# Altium PCB PowerV2.PcbDoc
Units mil, origin at the board's own origin, x right, y up, seen from the top; angles counter-clockwise.
Board outline 3625 x 3400 mil, 2 copper layers (Component Side, Bottom Layer), stack 65.756 mil thick; 65 components, 40 nets, 294 pads, 73 vias.
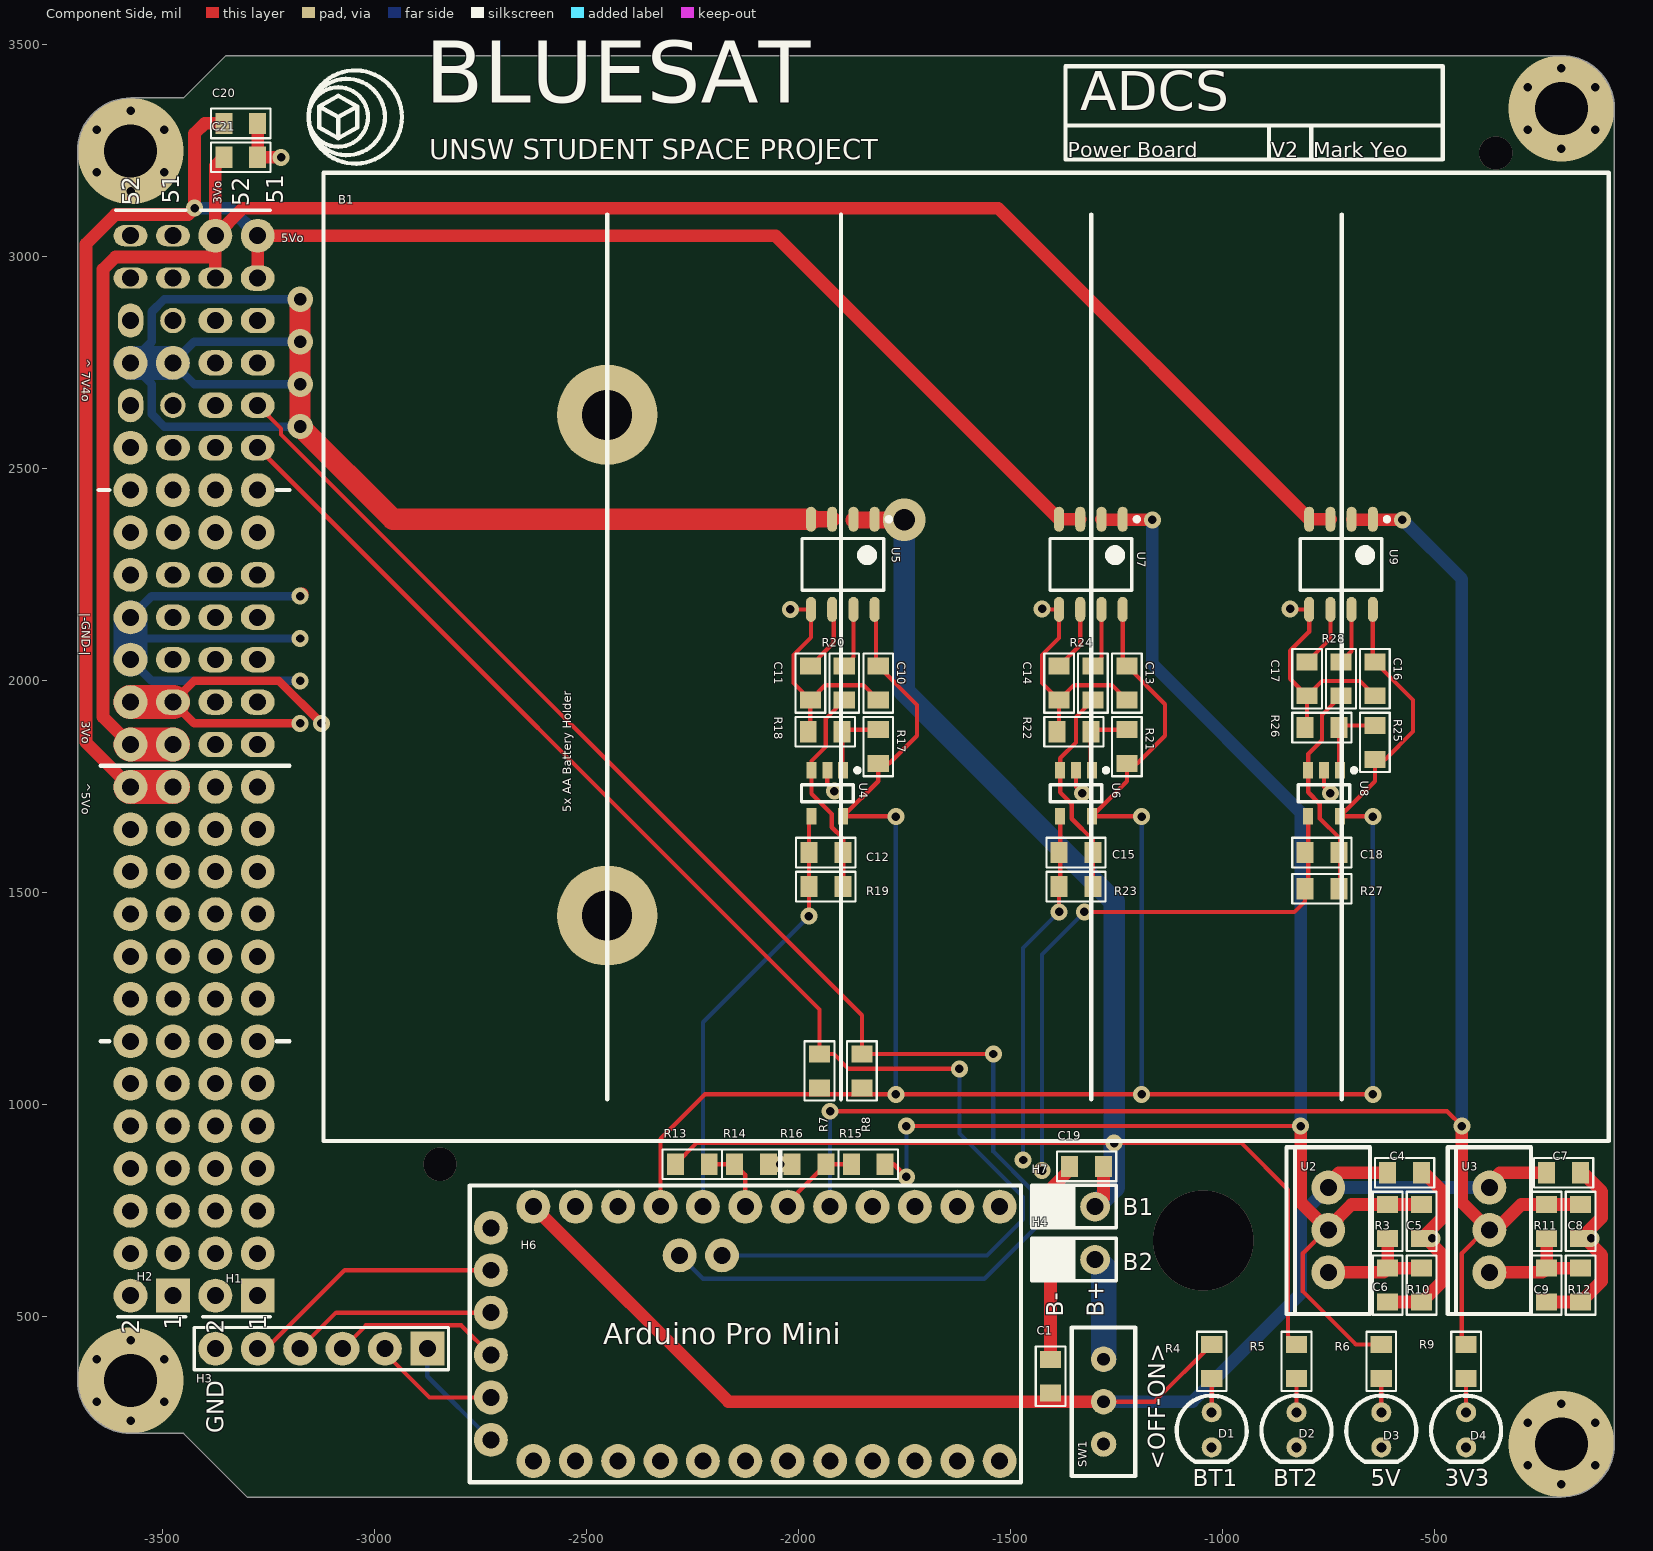
[diagram p0: Component Side view]
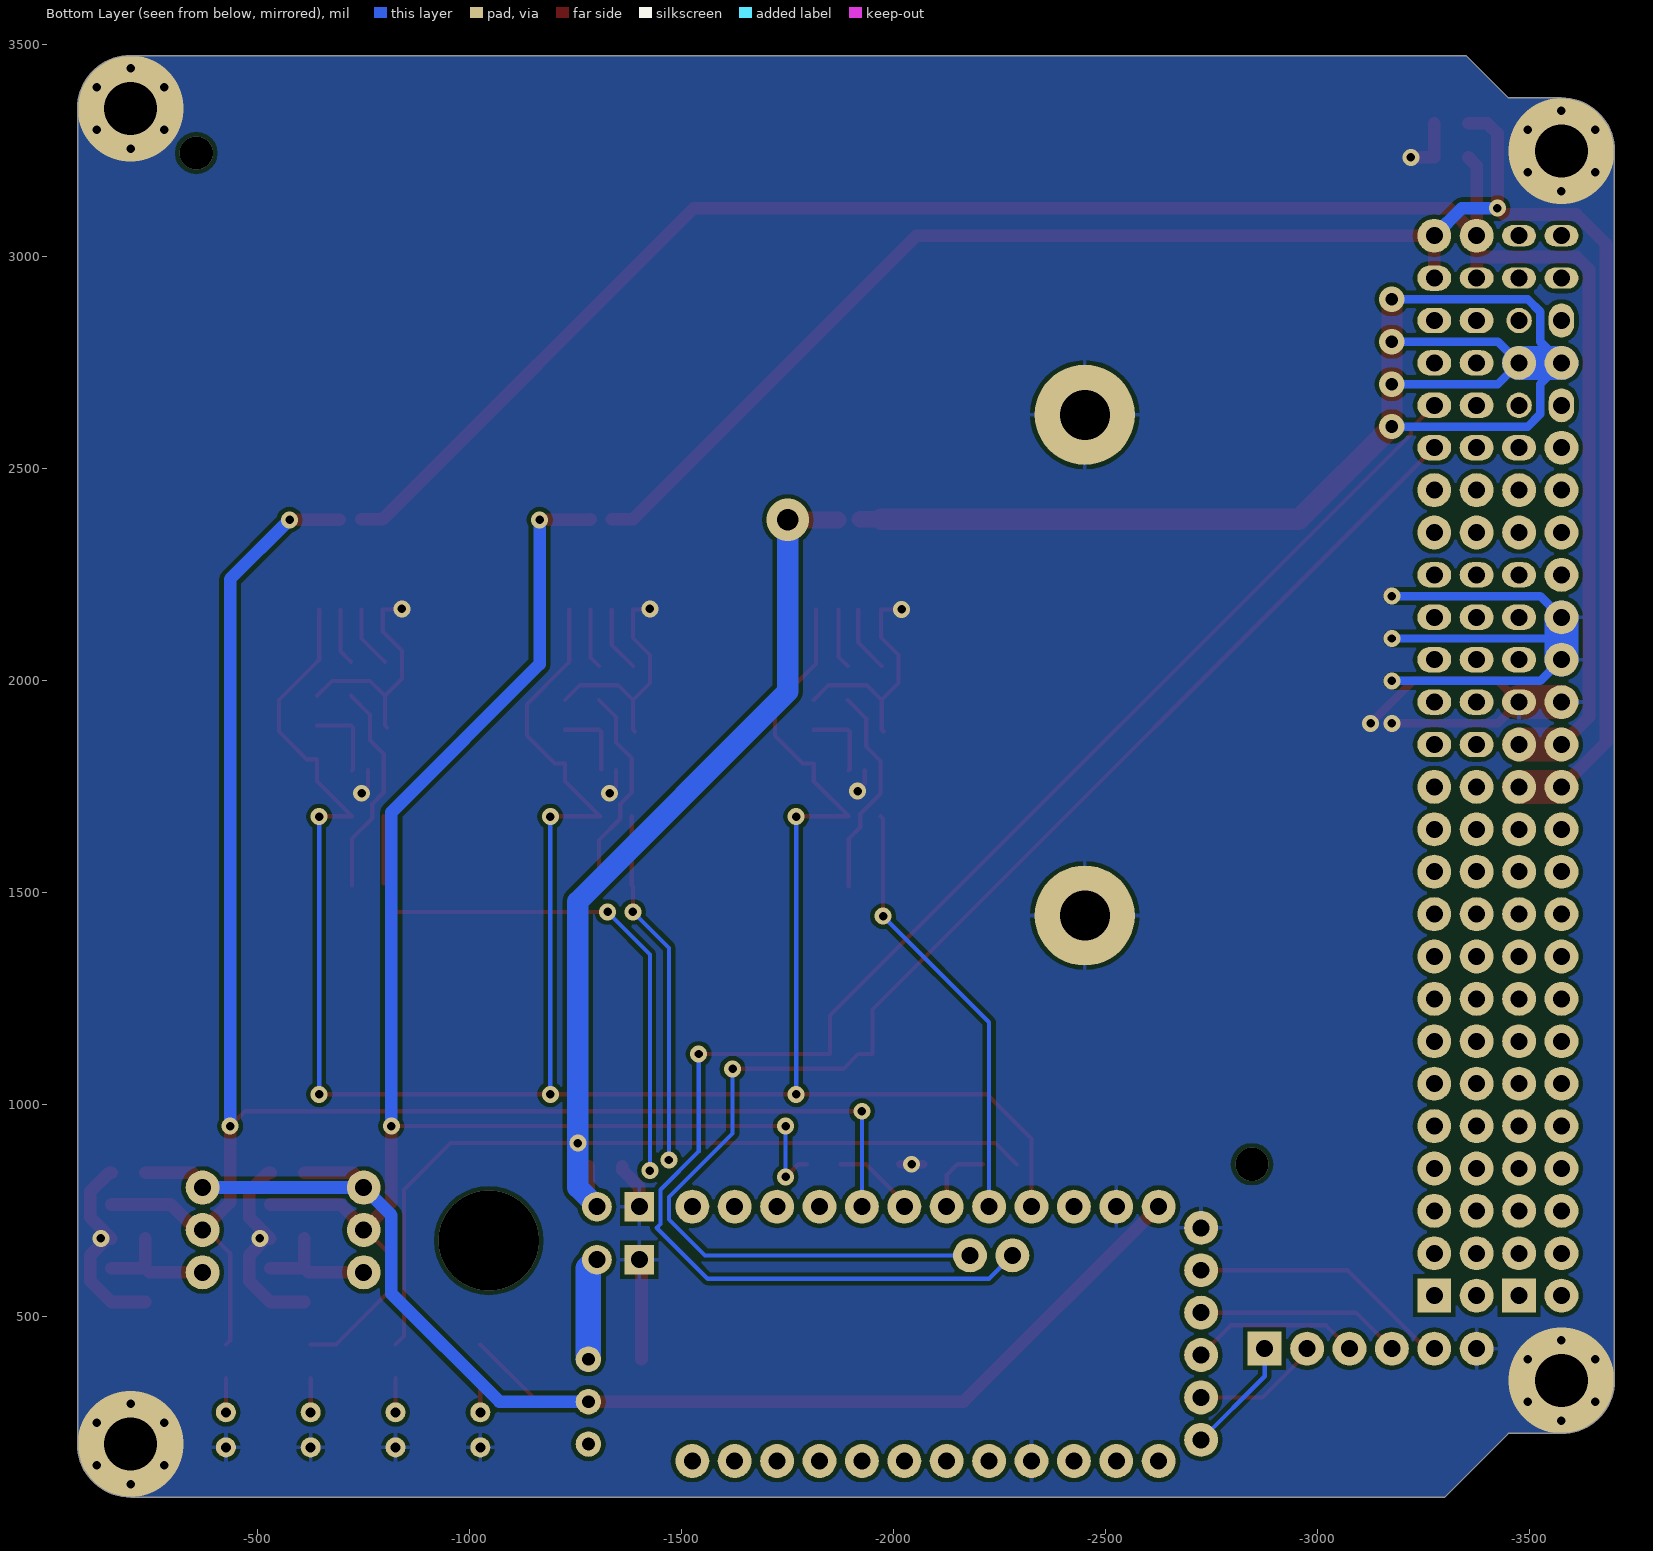
[diagram p1: Bottom Layer view, seen from below]

## Layer stack, top to bottom
Top Solder: solder mask 0.394, Solder Resist, Dk 3.5
Component Side: signal copper 1.378
Dielectric 1: core 63, FR-4, Dk 4.2
Bottom Layer: signal copper 1.378
Solder Side: solder mask 0.394, Solder Resist, Dk 3.5

## Board outline
-3575,225 cw(c-3575,350) -3700,350 -3700,3250 cw(c-3575,3250) -3575,3375 -3450,3375 -3350,3475 -200,3475 cw(c-200,3350) -75,3350 -75,200 cw(c-200,200) -200,75 -3300,75 -3450,225

## Design rules (kind name [scope] priority, off if disabled: settings)
Clearance [All] p1: gap=10
Clearance "Clearance (Same Net)" [All] p2: gap=0 except(8: SMDPad-SMDPad SMDPad-THPad SMDPad-Via)
ComponentClearance [All] p1: gap=0 collisioncheckmode=3 verticalgap=0 showdistances=FALSE
HoleSize HoleSize_1 [All] p1: absolutevalues=TRUE maxlimit=100000 minlimit=24 maxpercent=80.000 minpercent=20.000
HoleSize [All] p2: absolutevalues=TRUE maxlimit=100 minlimit=1 maxpercent=80.000 minpercent=20.000
HoleToHoleClearance mdViaViaSameLayer [All] p1: gap=8 allowstackedmicrovias=TRUE
HoleToHoleClearance [All] p2: gap=10 allowstackedmicrovias=TRUE
PasteMaskExpansion mlMinCreamFrame [All] p1: expansion=0
PasteMaskExpansion [All] p2: expansion=0
PlaneConnect PlaneConnect_1 [All] p1: planeconnectstyle=Relief reliefexpansion=20 reliefentries=4 reliefconductorwidth=10 reliefairgap=10
PlaneConnect PlaneConnect_2 [IsVia AND InNet('GND')] p2: planeconnectstyle=Direct reliefexpansion=20 reliefentries=4 reliefconductorwidth=10 reliefairgap=10
PolygonConnect ThermalVias [IsVia] p1: connectstyle=Direct reliefconductorwidth=10 reliefentries=4 polygonreliefangle="90 Angle" airgapwidth=10
PolygonConnect [All] p2: connectstyle=Relief reliefconductorwidth=10 reliefentries=4 polygonreliefangle="90 Angle" airgapwidth=10
RoutingVias [All] p1: holewidth=20 width=40 viastyle="Through Hole" minholewidth=20 minwidth=40 maxholewidth=20 maxwidth=40
SilkToSilkClearance [All] p1 off: silktosilkclearance=10
SilkToSolderMaskClearance [IsPad] p1 off: minsilkscreentomaskgap=10 clearancetoexposedcopper=TRUE
SolderMaskExpansion mlMinStopFrame [All] p1: expansion=4
SolderMaskExpansion [All] p2: expansion=4
Width Width_1 [All] p1: maxlimit=100000 minlimit=6 preferedwidth=10
Width [All] p2: maxlimit=10 minlimit=8 preferedwidth=10
23 further rules are at their usual default settings.

## Components (designator, comment, footprint, x,y, rotation, side; value= is the part's Value field where it differs from the comment)
B1 "5x AA Battery Holder" "5x AA Battery Holder" -3120,915 r0 top
C1 "10uF" 0805C-GENERIC -1405,330 r90 top
C4 "100nF" 0805C-TBD -600,840 r0 top
C5 "1UF" 0805C-GENERIC -530,755 r270 top
C6 "10uF" 0805C-GENERIC -610,605 r270 top
C7 "100nF" 0805C-TBD -225,840 r0 top
C8 "1UF" 0805C-GENERIC -155,755 r270 top
C9 "10uF" 0805C-GENERIC -235,605 r270 top
C10 "100nF" 0805C-TBD -1811.57,2025 r270 top
C11 "10nF" 0805C-TBD -1971.57,2025 r270 top
C12 "1nF" 0805C-TBD -1965,1595 r0 top
C13 "100nF" 0805C-TBD -1225,2025 r270 top
C14 "10nF" 0805C-TBD -1385,2025 r270 top
C15 "1nF" 0805C-TBD -1375,1595 r0 top
C16 "100nF" 0805C-TBD -640,2035 r270 top
C17 "10nF" 0805C-TBD -800,2035 r270 top
C18 "1nF" 0805C-TBD -795,1595 r0 top
C19 "10uF" 0805C-GENERIC -1290,855 r180 top
C20 "10uF" 0805C-GENERIC -3345,3315 r0 top
C21 "10uF" 0805C-GENERIC -3345,3235 r0 top
D1 "LED" LED -1025,275 r0 top
D2 "LED" LED -825,275 r0 top
D3 "LED" LED -625,275 r0 top
D4 "LED" LED -425,275 r0 top
H1 "26X2 Header" "26X2 Header"#1 -3275,550 r90 top
H2 "26X2 Header" "26X2 Header"#2 -3475,550 r90 top
H3 "Header 6" HDR1X6 -2875,425 r180 top
H4 "HEADER-1X2" HEADER-1X2 -1400,635 r90 top
H6 "Arduino Pro Mini" "Arduino Pro Mini" -2625,160 r90 top
H7 "HEADER-1X2" HEADER-1X2 -1400,760 r90 top
R3 "243R" 0805R-GENERIC -610,695 r90 top
R4 "300R" 0805R-150 -1025,425 r270 top
R5 "300R" 0805R-150 -825,425 r270 top
R6 "150R" 0805R-150 -625,425 r270 top
R7 "4K7" 0805R-4K7 -1950,1050 r90 top
R8 "4K7" 0805R-4K7 -1850,1050 r90 top
R9 "150R" 0805R-150 -425,425 r270 top
R10 "715R" 0805R-GENERIC -530,605 r270 top
R11 "243R" 0805R-GENERIC -235,695 r90 top
R12 "392R" 0805R-GENERIC -155,605 r270 top
R13 "28K5" 0805R-10K -2290,860 r0 top
R14 "10K" 0805R-10K -2150,860 r0 top
R15 "10K" 0805R-10K -1795,860 r180 top
R16 "40K" 0805R-10K -1935,860 r180 top
R17 "100K" 0805R-100K -1811.57,1815 r90 top
R18 "100K" 0805R-100K -1906.57,1880 r180 top
R19 "10K" 0805R-3K3 -1965,1515 r0 top
R20 "1K" 0805R-1K -1891.57,2025 r270 top
R21 "100K" 0805R-100K -1225,1815 r90 top
R22 "100K" 0805R-100K -1320,1880 r180 top
R23 "10K" 0805R-3K3 -1375,1515 r0 top
R24 "1K" 0805R-1K -1305,2025 r270 top
R25 "100K" 0805R-100K -640,1825 r90 top
R26 "100K" 0805R-100K -735,1890 r180 top
R27 "10K" 0805R-3K3 -795,1510 r0 top
R28 "1K" 0805R-1K -720,2035 r270 top
SW1 "ToggleSwitch" SWITCHFOOTPRINT -1280,400 r180 top
U2 "LM317T" LM317T -750,605 r90 top
U3 "LM317T" LM317T -370,605 r90 top
U4 "LM321" LM321 -1931.57,1735 r270 top
U5 "ACS712" ACS712 -1895,2275 r270 top
U6 "LM321" LM321 -1345,1735 r270 top
U7 "ACS712" ACS712 -1310,2275 r270 top
U8 "LM321" LM321 -760,1735 r270 top
U9 "ACS712" ACS712 -720,2275 r270 top

## Footprints (in the part's own frame and the unit in brackets; to place one, negate y for a bottom-side part, rotate by r counter-clockwise, add the part's x,y. Pads: shape width x height; smd on the part's side, far side on the other; paste and mask are expansions set on the pad)
"5x AA Battery Holder" [mm]
  round 6 hole 3 mask+0.102: 1(17,43.5)
  round 6 hole 3: 2(17,13.5)
  silkscreen extent 0,0 77,58
"26X2 Header"#1 [mil]
  rect 80x80 hole 40: 1(0,0)
  round 80 hole 40: 2(0,100) 3(100,0) 4(100,100) 5(200,0) 6(200,100) 7(300,0) 8(300,100) 9(400,0) 10(400,100) 11(500,0) 12(500,100) 13(600,0) 14(600,100) 15(700,0) 16(700,100) 17(800,0) 18(800,100) 19(900,0) 20(900,100) 21(1000,0) 22(1000,100) 23(1100,0) 24(1100,100) 25(1200,0) 26(1200,100) 37(1800,0) 38(1800,100) 39(1900,0) 40(1900,100) 51(2500,0) 52(2500,100)
  oval 60x80 hole 40: 27(1300,0) 28(1300,100) 29(1400,0) 30(1400,100) 31(1500,0) 32(1500,100) 33(1600,0) 34(1600,100) 35(1700,0) 36(1700,100) 41(2000,0) 42(2000,100) 43(2100,0) 44(2100,100) 45(2200,0) 46(2200,100) 47(2300,0) 48(2300,100) 49(2400,0)
  oval 50x80 hole 40: 50(2400,100)
  silkscreen extent -50,-30 2560,135, body extent -55,-47 2555,150, height 335
"26X2 Header"#2 [mil]
  rect 80x80 hole 40: 1(0,0)
  round 80 hole 40: 2(0,100) 3(100,0) 4(100,100) 5(200,0) 6(200,100) 7(300,0) 8(300,100) 9(400,0) 10(400,100) 11(500,0) 12(500,100) 13(600,0) 14(600,100) 15(700,0) 16(700,100) 17(800,0) 18(800,100) 19(900,0) 20(900,100) 21(1000,0) 22(1000,100) 23(1100,0) 24(1100,100) 25(1200,0) 26(1200,100) 27(1300,0) 28(1300,100) 30(1400,100) 32(1500,100) 34(1600,100) 36(1700,100) 37(1800,0) 38(1800,100) 39(1900,0) 40(1900,100) 42(2000,100) 45(2200,0) 46(2200,100)
  oval 60x80 hole 40: 29(1400,0) 31(1500,0) 33(1600,0) 35(1700,0) 41(2000,0)
  round 60 hole 40: 43(2100,0) 47(2300,0)
  oval 80x60 hole 40: 44(2100,100) 48(2300,100)
  oval 50x80 hole 40: 49(2400,0) 50(2400,100) 51(2500,0) 52(2500,100)
  silkscreen extent -50,-30 2560,135, body extent -55,-47 2555,150, height 335
0805C-GENERIC [mil] "CAPACITOR 0805"
  rect 40x50 smd: 1(-10,0) 2(70,0)
  silkscreen extent -40,-35 100,35, body extent -11,-25 70,25, height 26
0805C-TBD [mil] "CAPACITOR 0805"
  rect 40x50 smd: 1(-10,0) 2(70,0)
  silkscreen extent -40,-35 100,35, body extent -11,-25 70,25, height 26
0805R-1K [mil] "RESISTOR 0805"
  rect 40x50 smd: 1(-10,0) 2(70,0)
  silkscreen extent -40,-35 100,35, body extent -11,-25 70,25, height 27
0805R-3K3 [mil] "RESISTOR 0805"
  rect 40x50 smd: 1(-10,0) 2(70,0)
  silkscreen extent -40,-35 100,35, body extent -11,-25 70,25, height 27
0805R-4K7 [mil] "RESISTOR 0805"
  rect 40x50 smd: 1(-10,0) 2(70,0)
  silkscreen extent -40,-35 100,35, body extent -11,-25 70,25, height 27
0805R-10K [mil] "RESISTOR 0805"
  rect 40x50 smd: 1(0,0) 2(80,0)
  silkscreen extent -30,-35 110,35, body extent -1,-25 80,25, height 27
0805R-100K [mil] "RESISTOR 0805"
  rect 40x50 smd: 1(-10,0) 2(70,0)
  silkscreen extent -40,-35 100,35, body extent -11,-25 70,25, height 27
0805R-150 [mil] "RESISTOR 0805"
  rect 40x50 smd: 1(-10,0) 2(70,0)
  silkscreen extent -40,-35 100,35, body extent -11,-25 70,25, height 27
0805R-GENERIC [mil] "RESISTOR 0805"
  rect 40x50 smd: 1(-10,0) 2(70,0)
  silkscreen extent -40,-35 100,35, body extent -11,-25 70,25, height 27
ACS712 [mm]
  oval 1.5x0.6 smd: 1(-2.7,1.905) 2(-2.7,0.635) 3(-2.7,-0.635) 4(-2.7,-1.905) 5(2.7,-1.905) 6(2.7,-0.635) 7(2.7,0.635) 8(2.7,1.905)
  silkscreen extent -2.82,-2.45 1.55,2.88, body extent -3,-2.45 3,2.45, height 1.9
"Arduino Pro Mini" [mil]
  round 80 hole 40: 1(0,0) 2(0,-100) 3(0,-200) 4(0,-300) 5(0,-400) 6(0,-500) 7(0,-600) 8(0,-700) 9(0,-800) 10(0,-900) 11(0,-1000) 12(0,-1100) 13(600,0) 14(600,-100) 15(600,-200) 16(600,-300) 17(600,-400) 18(600,-500) 19(600,-600) 20(600,-700) 21(600,-800) 22(600,-900) 23(600,-1000) 24(600,-1100) 25(485,-345) 26(485,-445) 27(50,100) 28(150,100) 29(250,100) 30(350,100) 31(450,100) 32(550,100)
  silkscreen extent -50,-1150 650,150
HDR1X6 [mil] "Connector; Header; 6 Position"
  rect 80x80 hole 40: 1(0,0)
  round 80 hole 40: 2(100,0) 3(200,0) 4(300,0) 5(400,0) 6(500,0)
  silkscreen extent -50,-50 550,50
HEADER-1X2 [mil]
  rect 70x70 hole 40: 1(0,0)
  round 70 hole 40: 2(0,-100)
  silkscreen extent -50,-150 50,50, body extent -50,-150 50,50, height 470
LED [mm]
  round 1.2 hole 0.6: 1(0,0) 2(0,-2.1)
  silkscreen extent -2.1,-2.96 2.1,1
LM317T [mil]
  round 80 hole 40: 1(0,0) 2(100,0) 3(200,0)
  silkscreen extent -98,-98 295,98
LM321 [mm]
  rect 1x0.6 smd: 1(-1.375,0.95) 2(-1.375,0) 3(-1.375,-0.95) 4(1.375,-0.95) 5(1.375,0.95)
  silkscreen extent -1.5,-1.55 0.5,1.93, body extent -1.5,-1.53 1.5,1.53, height 1.45
SWITCHFOOTPRINT [mil]
  round 60 hole 30: 2(0,0) 3(0,100) 4(0,200)
  silkscreen extent -75,-75 75,275, body extent -75,-75 75,275, height 300

## Part data
C1 C19 C20 C21: library part 0805C-10UF-16V-X5R-TDK, "CAPACITOR 0805 CERAMIC"
C4 C7 C10 C11 C12 C13 C14 C15 C16 C17 C18: library part 0805C-100nF-25V-X7R-MUR, "CAPACITOR 0805 CERAMIC"
C5 C8: library part 0805C-2U2-6V3-X5R-PAN, "CAPACITOR 0805 CERAMIC"
C6 C9: library part 0805C-10UF-25V-X5R-SAM, "CAPACITOR 0805 CERAMIC"
D1 D2 D3 D4: "Small LED"
H3: "Header, 6-Pin"
R3 R10 R11 R12: library part 0805R-1R, "RESISTOR 0805 1/3 WATT"
R4 R5 R6 R9: library part 0805R-150, "RESISTOR 0805 1/4 WATT THIN FILM"
R7 R8: library part 0805R-4K7, "RESISTOR 0805 1/4 WATT THIN FILM"
R13 R14 R15 R16: library part 0805R-10K, "RESISTOR 0805 1/4 WATT THIN FILM"
R17 R18 R21 R22 R25 R26: library part 0805R-100K, "RESISTOR 0805 1/4 WATT THIN FILM"
R19 R23 R27: library part 0805R-3K3, "RESISTOR 0805 1/4 WATT THIN FILM"
R20 R24 R28: library part 0805R-1K, "RESISTOR 0805 1/4 WATT THIN FILM"
U2 U3: "Adjustable Voltage Regulator"
U4 U6 U8: "Op-amp"
U5 U7 U9: "Current Sensor"

## Via types
v1: diameter 40, hole 20, Component Side to Bottom Layer, 61 vias
v2: diameter 250, hole 125, Component Side to Bottom Layer, 4 vias
v3: diameter 60, hole 30, Component Side to Bottom Layer, 4 vias
v4: diameter 78.74, hole 78.74, Component Side to Bottom Layer, 2 vias
v5: diameter 236.22, hole 236.22, Component Side to Bottom Layer, 1 vias
v6: diameter 100, hole 50, Component Side to Bottom Layer, 1 vias

## Nets (pads, with @x,y where several pads share a name; then routed paths per layer and width w, separated by ;. In a path a pad name is that pad's centre, name@x,y a point inside that pad or via, vN(x,y) a via of type N, cw(c..) or ccw(c..) an arc to the next point about the centre after c; other vN are vias at no path point)
3V3: C8.1 H6.20 R9.1 R11.2 U3.2 U9.1 U9.2 | length 4154.9
  Component Side w10: v1(-1925,985) -470,985 v1(-435,950) ; R9.1 -435,445 -435,650 U3.2@-380,705
  Component Side w30: U9.2@-693.7,2380 v1(-575,2380) ; v1(-435,950) -435,770 U3.2 ; U3.2@-380,705 U3.2 ; C8.1 R11.2 -295,765 -355,705 U3.2
  Bottom Layer w10: H6.20 v1(-1925,985)
  Bottom Layer w30: v1(-575,2380) -435,2240 v1(-435,950)
3V3_OUT: C21.1 H1.50 H1.52 H2.27 H2.28 U9.3 U9.4 | length 4778.9
  Component Side w30: H2.28 -3640,1915 -3640,2970.71 -3610.71,3000 -3375,3000 ; H1.50 -3375,3000 ; C21.1 -3375,3215 H1.52 ; U9.3 U9.4 -1528.7,3115 -3310,3115 H1.52 ; -3375,3000 H1.52
  Component Side w80: H2.28 H2.27
5V: C5.1 R3.2 R6.1 R15.1 U2.2 U7.1 U7.2 | length 3734.3
  Component Side w10: R15.1 -1775,860 v1(-1745,830) ; v1(-1745,950) v1(-815,950) ; U2.2@-755,705 -810,650 -810,560 -685,435 R6.1
  Component Side w30: U7.2 -1283.7,2380 v1(-1165,2380) ; v1(-815,950) -815,770 U2.2@-752.5,707.5 ; U2.2@-755,705 U2.2@-752.5,707.5 ; U2.2 U2.2@-752.5,707.5 ; C5.1 R3.2 -695,765 U2.2@-752.5,707.5
  Bottom Layer w10: v1(-1745,830) v1(-1745,950)
  Bottom Layer w30: v1(-1165,2380) -1165,2040 -815,1690 v1(-815,950)
5V_OUT: C20.1 H1.49 H1.51 H2.25 H2.26 U7.3 U7.4 | length 4463
  Component Side w30: H2.26 -3680,1855 -3680,3030.71 -3610.71,3100 -3439,3100 v1(-3424,3115) -3424,3291 -3400,3315 C20.1 ; H1.49 H1.51 -2053.7,3050 U7.4 U7.3
  Component Side w80: H2.26 H2.25
  Bottom Layer w30: v1(-3424,3115) -3340,3115 H1.51
CURR_3V3: C18.1 R27.1 U8.4 | length 1375
  Component Side w10: v1(-1325,1455) -830,1455 -805,1480 R27.1@-805,1515 ; R27.1@-797.4,1522.6 U8.4
  Bottom Layer w10: v1(-1425,845) -1425,1355 v1(-1325,1455)
CURR_5V: C15.1 R23.1 U6.4 | length 843.5
  Component Side w10: v1(-1385,1455) R23.1 ; R23.1@-1382.4,1517.6 U6.4
  Bottom Layer w10: v1(-1470,870) -1470,1370 v1(-1385,1455)
CURR_VBAT1: C12.1 H6.17 R19.1 U4.4 | length 1026.9
  Component Side w10: v1(-1975,1445) R19.1 C12.1 -1975,1674.84 U4.4
  Bottom Layer w10: H6.17 -2225,1195 v1(-1975,1445)
GND: B1.1 B1.2 C1.2 C4.2 C5.2 C6.2 C7.2 C8.2 C9.2 C10.2 C11.2 C13.2 C14.2 C16.2 C17.2 C19.2 C20.2 C21.2 D1.2 D2.2 D3.2 D4.2 H2.29 H2.30 H2.32 H2.34 H3.6 H4.1 H6.4 H6.14 H6.32 H7.1 R10.2 R12.2 R14.2 R16.2 R18.2 R22.2 R26.2 U4.2 U5.5 U6.2 U7.5 U8.2 U9.5 | length 5516.4
  Component Side w10: v1(-2018.7,2168.7) U5.5 -1970,2102.79 -2011.57,2061.21 -2011.57,1995 C11.2 ; R18.2 -1971.57,1885 C11.2 ; U4.2 -1931.57,1756.57 v1(-1915,1740) ; C10.2 -1846.57,1990 -1936.57,1990 C11.2 ; v1(-1425,2170) -1423.7,2168.7 U7.5 -1385,2101.21 -1425,2061.21 -1425,1995 C14.2 ; R22.2 -1385,1885 C14.2 ; U6.2 -1345,1750 v1(-1330,1735) ; C13.2 -1260,1990 -1350,1990 C14.2 ; v1(-840,2170) -838.7,2168.7 U9.5 -795,2116.21 -840,2071.21 -840,2005 C17.2 ; R26.2 -800,1895 C17.2 ; U8.2 -760,1750 v1(-745,1735) ; C16.2 -675,2000 -765,2000 C17.2
  Component Side w20: v1(-3175,1900) -3425,1900 H2.29 -3425,2000 -3225,2000 v1(-3125,1900) ; R14.2 R16.2
  Component Side w30: C20.2 C21.2 v1(-3220,3235) ; v1(-3175,2200) v1@-3170,2205 ; C1.2 -1405,630 H4.1 ; H7.1 -1400,806.36 -1360,846.36 C19.2 ; C6.2 R10.2 -529.64,535 -480,584.64 -480,645.36 -519.64,685 -529.64,685 -480,734.64 -480,795.36 -524.64,840 C4.2 ; C9.2 R12.2 -154.64,535 -105,584.64 -105,645.36 -144.64,685 -154.64,685 -105,734.64 -105,795.36 -149.64,840 C7.2
  Component Side w80: H2.30 H2.29
  Bottom Layer w20: H2.32 -3525,2000 v1(-3175,2000) ; -3575,2100 v1(-3175,2100) ; H2.34 -3525,2200 v1(-3175,2200)
  Bottom Layer w80: H2.32 -3575,2100 H2.34
  other v1: -200,105 -280,150 -120,150 -280,250 -120,250 -3575,255 -200,295 -3655,300 -3495,300 -3655,400 -3495,400 -3575,445 -505,685 -130,685 -2042.5,860 -3575,3155 -3655,3200 -3495,3200 -200,3255 -3655,3300 -3495,3300 -280,3300 -120,3300 -3575,3345 -280,3400 -120,3400 -200,3445
  other v2: -200,200 -3575,350 -3575,3250 -200,3350
NetC6_1: C6.1 R3.1 R10.1 U2.1 | length 299.1
  Component Side w30: U2.1@-755,605 -620,605 C6.1 ; R3.1 C6.1 ; R10.1 C6.1
NetC9_1: C9.1 R11.1 R12.1 U3.1 | length 299.1
  Component Side w30: U3.1@-380,605 -245,605 C9.1 ; R11.1 C9.1 ; R12.1 C9.1
NetC11_1: C11.1 U5.6 | length 156.5
  Component Side w10: C11.1 -1916.57,2090 U5.6@-1916.57,2168.7
NetC12_2: C12.2 R19.2 R20.2 U4.3 | length 502.2
  Component Side w10: R19.2@-1894.17,1515.83 -1894.17,1628.16 -1920.98,1654.97 -1920.98,1685.98 -1968.98,1733.98 U4.3 -1968.98,1811.02 -1935,1845 -1935,1911.57 R20.2
NetC14_1: C14.1 U7.6 | length 154.4
  Component Side w10: C14.1 -1335,2085 U7.6
NetC15_2: C15.2 R23.2 R24.2 U6.3 | length 504.1
  Component Side w10: R23.2 C15.2 -1305,1625 -1355,1675 -1355,1710 -1382.4,1737.4 U6.3 -1382.4,1817.6 -1345,1855 -1345,1915 R24.2
NetC17_1: C17.1 U9.6 | length 146.5
  Component Side w10: C17.1 -745,2100 U9.6
NetC18_2: C18.2 R27.2 R28.2 U8.3 | length 510.6
  Component Side w10: R27.2@-722.6,1517.4 -722.6,1628.16 -770,1675.56 -770,1710 -797.4,1737.4 U8.3 -797.4,1827.6 -765,1860 -765,1920 R28.2
NetD1_1: D1.1 R4.2 | length 80
  Component Side w10: D1.1 R4.2
NetD2_1: D2.1 R5.2 | length 80
  Component Side w10: D2.1 R5.2
NetD3_1: D3.1 R6.2 | length 80
  Component Side w10: D3.1 R6.2
NetD4_1: D4.1 R9.2 | length 80
  Component Side w10: D4.1 R9.2
NetH3_1: H3.1 H6.27 | length 277.1
  Bottom Layer w10: H3.1 -2875,360 H6.27
NetH3_2: H3.2 H6.28 | length 303.5
  Component Side w10: H3.2 -2975,415 -2870,310 H6.28
NetH3_3: H3.3 H6.29 | length 401.8
  Component Side w10: H3.3 -3020,480 -2795,480 H6.29
NetH3_4: H3.4 H6.30 | length 485.2
  Component Side w10: H3.4 -3090,510 H6.30
NetH3_5: H3.5 H6.31 | length 631.1
  Component Side w10: H3.5@-3270.5,425 H3.5 -3255,425 -3070,610 H6.31
NetH4_2: H4.2 SW1.2 | length 243.3
  Bottom Layer w60: H4.2 -1280,615 SW1.2
NetH6_18: H6.18 R13.2 R14.1 | length 170.4
  Component Side w10: R13.2 R14.1 -2125,835 H6.18
NetH6_19: H6.19 R15.2 R16.1 | length 197.3
  Component Side w10: H6.19 -2025,770 R16.1 R15.2
NetR17_2: R17.2 R18.1 U4.1 | length 171.9
  Component Side w10: R18.1 -1896.57,1791.54 U4.1 ; R18.1@-1891.57,1885 R17.2
NetR20_1: R20.1 U5.7 | length 142.6
  Component Side w10: R20.1 -1870,2056.57 U5.7
NetR21_2: R21.2 R22.1 U6.1 | length 168.5
  Component Side w10: U6.1@-1310,1791.54 R22.1 ; R22.1@-1305,1885 R21.2
NetR24_1: R24.1 U7.7 | length 142
  Component Side w10: R24.1 -1285,2055 U7.7
NetR25_2: R25.2 R26.1 U8.1 | length 181.9
  Component Side w10: R26.1 -725,1791.54 U8.1 ; R26.1@-720,1895 R25.2
NetR28_1: R28.1 U9.7 | length 134.1
  Component Side w10: R28.1 -695,2070 U9.7
SCL_EXT: H1.43 H6.25 R8.2 | length 3792.4
  Component Side w10: H1.43 -3220,2595 -3220,2581.36 -1850,1211.36 R8.2 v1(-1540,1120)
  Bottom Layer w10: H6.25 -2225,590 -1561.21,590 -1441.21,710 -1450,718.79 -1450,800 -1540,890 v1(-1540,1120)
SDA_EXT: H1.41 H6.26 R7.2 | length 3486.9
  Component Side w10: H1.41 -1950,1225 R7.2 -1916.21,1120 -1881.21,1085 v1(-1620,1085)
  Bottom Layer w10: H1.41 H1.41@-3273.79,2550 ; H6.26 -1555,645 -1470,730 -1470,782.78 -1620,932.78 v1(-1620,1085)
VBAT1: C19.1 H7.2 R5.1 R13.1 U5.1 U5.2 | length 3950.2
  Component Side w10: R13.1 -2240,910 -955,910 -845,800 -845,455 R5.1
  Component Side w30: H7.2 -1280,780 C19.1
  Component Side w40: U5.2@-1868.7,2380 v6(-1750,2380)
  Bottom Layer w50: v6(-1750,2380) -1750,1975 -1255,1480 v1(-1255,910) -1255,805 H7.2
VBAT1_OUT: H2.45 H2.46 U5.3 U5.4 | length 3394.1
  Component Side w40: U5.4 U5.3
  Component Side w50: v3(-3175,2900) v3(-3175,2800) v3(-3175,2700) v3(-3175,2600) -2956.3,2381.3 U5.4
  Bottom Layer w20: v3(-3175,2600) -3495.71,2600 -3525,2629.29 -3525,2700 H2.46 -3525,2800 -3525,2870.71 -3495.71,2900 v3(-3175,2900) ; v3(-3175,2700) -3425,2700 H2.45 -3425,2800 v3(-3175,2800)
  Bottom Layer w80: H2.46 H2.45
VBAT2: C1.1 C4.1 C7.1 H6.13 R4.1 SW1.3 U2.3 U3.3 | length 3395.9
  Component Side w10: SW1.3 -1160,300 R4.1
  Component Side w30: H6.13 -2165,300 SW1.3 ; U2.3@-755,805 -755,810 -725,840 C4.1 ; U3.3@-380,805 -345,840 C7.1
  Bottom Layer w30: SW1.3 -1070,300 -815,555 -815,740 U2.3 U3.3
VCC: C10.1 C13.1 C16.1 H6.16 R7.1 R8.1 R17.1 R21.1 R25.1 U4.5 U5.8 U6.5 U7.8 U8.5 U9.8 | length 6012.3
  Component Side w10: H6.16 -2325,920 -2220,1025 v1(-1770,1025) v1(-1190,1025) v1(-645,1025) ; U5.8@-1816.57,2168.7 -1816.57,2040 C10.1 -1720,1943.43 -1720,1870.5 -1785.5,1805 R17.1 -1811.57,1763.46 U4.5 -1770.87,1680.87 v1(-1770,1680) ; U7.8 -1235,2045 C13.1 -1135,1945 -1135,1870.5 -1200.5,1805 R21.1 -1225,1763.46 U6.5 -1190.87,1680.87 v1(-1190,1680) ; v1(-645,1680) -645.87,1680.87 U8.5 -640,1763.46 R25.1 -615.5,1815 -550,1880.5 -550,1955 C16.1 -645,2050 U9.8
  Bottom Layer w10: v1(-1770,1025) v1(-1770,1680) ; v1(-1190,1025) v1(-1190,1680) ; v1(-645,1025) v1(-645,1680)
pads on no net: H1.1 H1.2 H1.3 H1.4 H1.5 H1.6 H1.7 H1.8 H1.9 H1.10 H1.11 H1.12 H1.13 H1.14 H1.15 H1.16 H1.17 H1.18 H1.19 H1.20 H1.21 H1.22 H1.23 H1.24 H1.25 H1.26 H1.27 H1.28 H1.29 H1.30 H1.31 H1.32 H1.33 H1.34 H1.35 H1.36 H1.37 H1.38 H1.39 H1.40 H1.42 H1.44 H1.45 H1.46 H1.47 H1.48 H2.1 H2.2 H2.3 H2.4 H2.5 H2.6 H2.7 H2.8 H2.9 H2.10 H2.11 H2.12 H2.13 H2.14 H2.15 H2.16 H2.17 H2.18 H2.19 H2.20 H2.21 H2.22 H2.23 H2.24 H2.31 H2.33 H2.35 H2.36 H2.37 H2.38 H2.39 H2.40 H2.41 H2.42 H2.43 H2.44 H2.47 H2.48 H2.49 H2.50 H2.51 H2.52 H6.1 H6.2 H6.3 H6.5 H6.6 H6.7 H6.8 H6.9 H6.10 H6.11 H6.12 H6.15 H6.21 H6.22 H6.23 H6.24 SW1.4
copper on no net:
  other v4: -2845,860 -355,3245
  other v5: -1045,680

## Polygon pours and split planes (outlines as drawn)
GND on Bottom Layer "Bottom Layer-GND" (solid, pour order 7): -3575,225 cw(c-3575,350) -3700,350 -3700,3250 cw(c-3575,3250) -3575,3375 -3450,3375 -3350,3475 -200,3475 cw(c-200,3350) -75,3350 -75,200 cw(c-200,200) -200,75 -3300,75 -3450,225

## Silkscreen, mask and mechanical layers (free items; w line width, h text height)
Top Overlay:
  circle w10: c-3085,3330 r70
  circle w10: c-3065,3330 r90
  circle w10: c-3045,3330 r110
  lines w10: -3650,2450 -3625,2450 ; -3645,1150 -3625,1150 ; -3645,1800 -3200,1800 ; -3230,1150 -3200,1150 ; -3230,2450 -3200,2450 ; -1370,3310 -480,3310 ; -890,3230 -890,3310 ; -790,3230 -790,3310 ; -3130,3355 -3085,3330 ; -3130,3355 -3130,3305 -3085,3280 ; -3130,3355 -3085,3380 -3040,3355 ; -3085,3280 -3085,3330 ; -3085,3280 -3040,3305 -3040,3355 ; -3085,3330 -3040,3355 ; -1370,3230 -1370,3450 -480,3450 -480,3230 -1370,3230
  text "BLUESAT" at -2880,3315 h250
  text "ADCS" at -1335,3315 h157.48
  text "Power Board" at -1365,3235 h35
  text "V2" at -885,3235 h35
  text "Mark Yeo" at -785,3235 h35
  text "UNSW STUDENT SPACE PROJECT" at -2870,3230 h47.24
  text "3Vo" at -3360,3125 h20 r90
  text "5Vo" at -3220,3035 h20
  text "^ 7V4o" at -3690,2760 h20 r270
  text "|-GND-|" at -3690,2160 h20 r270
  text "3Vo" at -3690,1905 h20 r270
  text "^5Vo" at -3690,1760 h20 r270
  text "B1" at -1235,740 h40
  text "B2" at -1235,610 h40
  text "B-" at -1375,500 h40 r90
  text "B+" at -1280,500 h40 r90
  text "GND" at -3355,225 h40 r90
  text "<OFF-ON>" at -1135,140 h40 r90
  text "BT1" at -1070,100 h40
  text "BT2" at -880,100 h40
  text "5V" at -650,100 h40
  text "3V3" at -475,100 h40
Mechanical 13:
  lines w10: -3700,350 ccw(c-3575,350) -3575,225 -3500,225 -3450,225 -3300,75 -200,75 ccw(c-200,200) -75,200 -75,3350 ccw(c-200,3350) -200,3475 -3350,3475 -3450,3375 -3500,3375 -3575,3375 ccw(c-3575,3250) -3700,3250 -3700,350

## Text inside footprints (layer, text, board x,y; h text height)
H1: Top Overlay "2" at -3355,460.16 h40 r90; Top Overlay "1" at -3255,470.16 h40 r90; Top Overlay "51" at -3215,3125 h40 r90; Top Overlay "52" at -3295,3120 h40 r90
H2: Top Overlay "2" at -3555,460.16 h40 r90; Top Overlay "1" at -3455,470.16 h40 r90; Top Overlay "51" at -3460,3125.16 h40 r90; Top Overlay "52" at -3555,3120.16 h40 r90